# Altium PCB pcb.PcbDoc
Units mm, origin at the board's own origin, x right, y up, seen from the top; angles counter-clockwise.
Board outline 50 x 20 mm, 2 copper layers (Top Layer, Bottom Layer); 10 components, 7 nets, 20 pads, 0 vias.
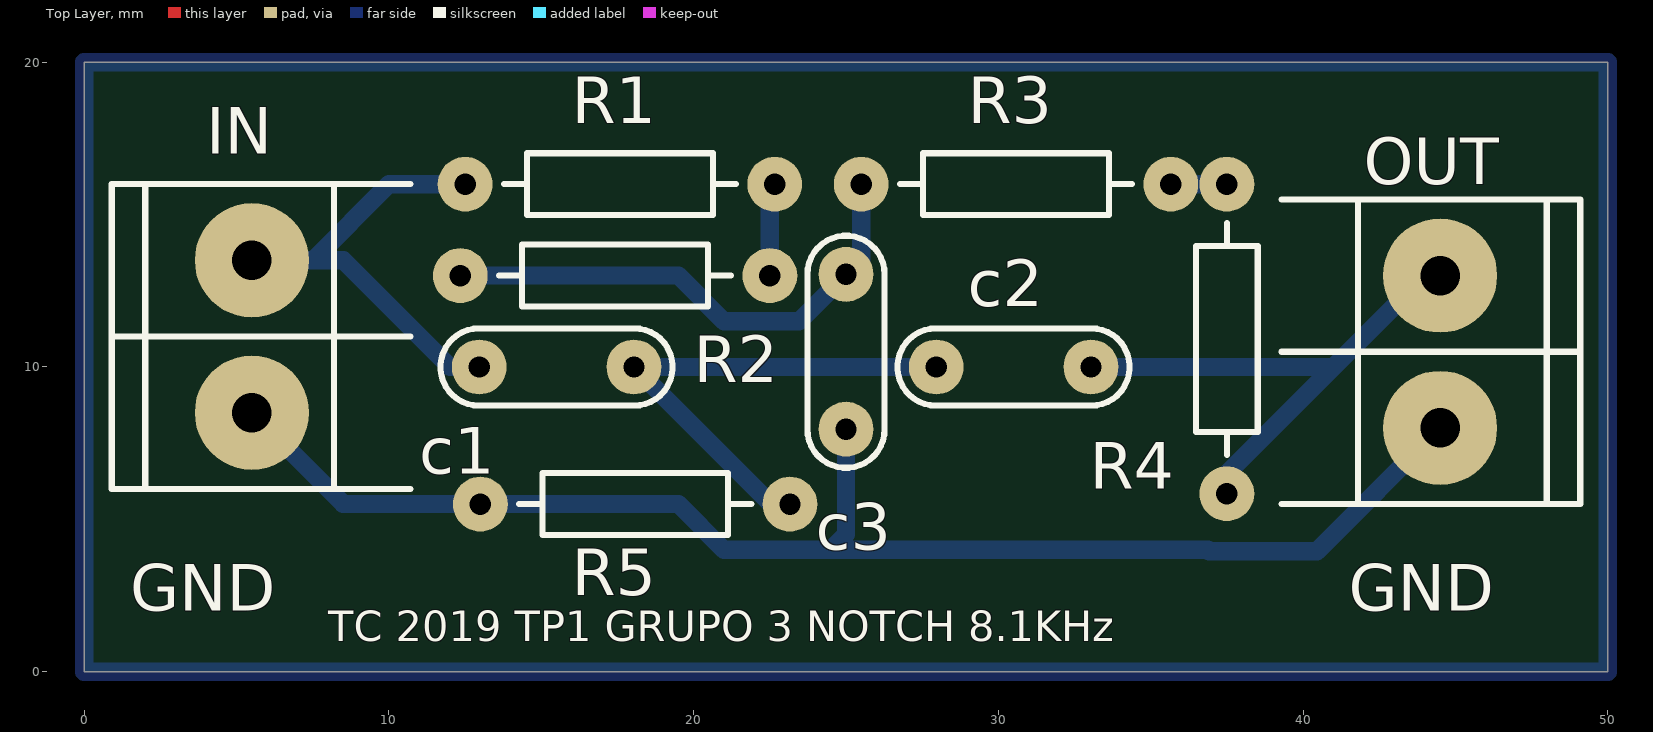
[diagram p0: Top Layer view]
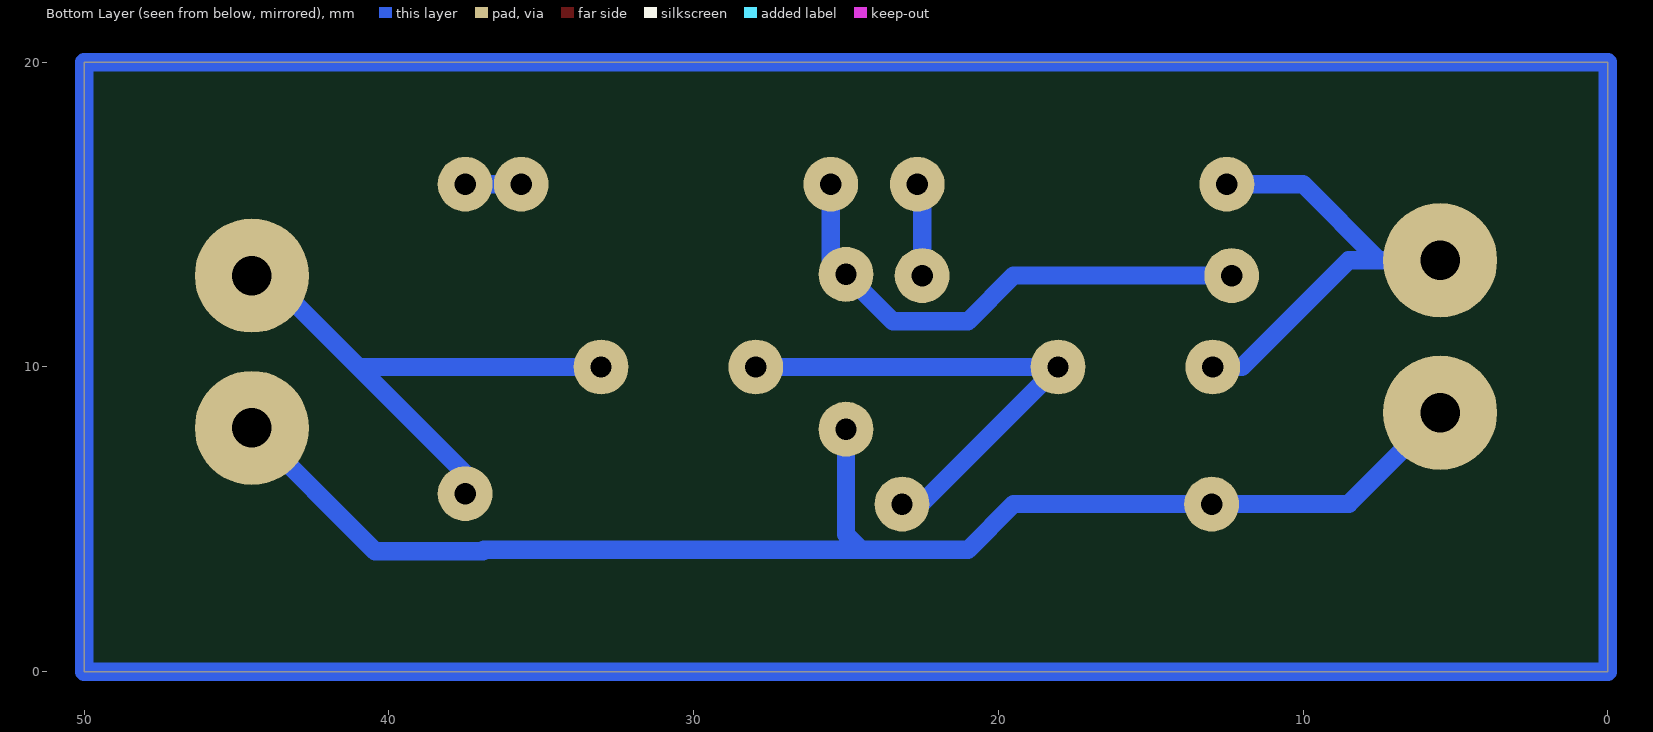
[diagram p1: Bottom Layer view, seen from below]
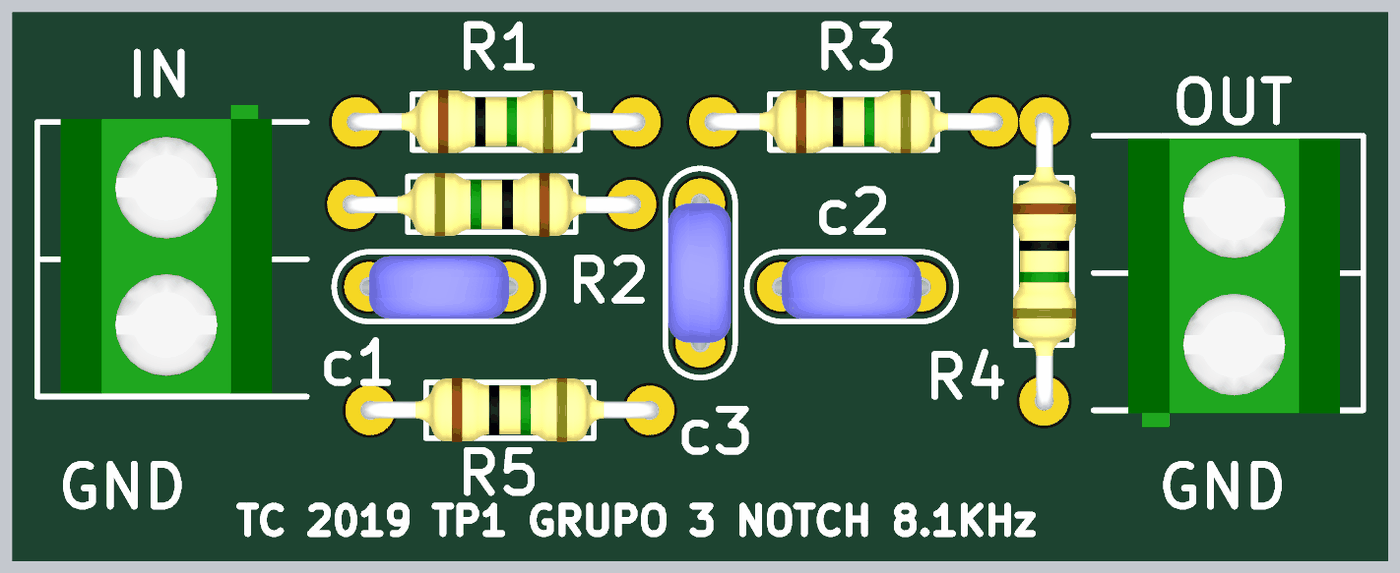
[diagram p2: 3D render of the assembled board from above, using the file's embedded part models]

## Layer stack, top to bottom
Top Solder: solder mask 0.0102, Solder Resist, Dk 3.5
Top Layer: signal copper 0.0356
Dielectric 1: dielectric 0.32, FR-4, Dk 4.8
Bottom Layer: signal copper 0.0356
Bottom Solder: solder mask 0.0102, Solder Resist, Dk 3.5

## Board outline
0,0 0,20 50,20 50,0

## Design rules (kind name [scope] priority, off if disabled: settings)
Clearance [All] p1: gap=0.3
PolygonConnect [All] p1: connectstyle=Relief reliefconductorwidth=0.254 reliefentries=4 polygonreliefangle="90 Angle" airgapwidth=0.254
RoutingVias [All] p1: holewidth=0.711 width=1.27 viastyle="Through Hole" minholewidth=0.711 minwidth=1.27 maxholewidth=0.711 maxwidth=1.27
SolderMaskExpansion [All] p1: expansion=0.102
Width [All] p1: maxlimit=0.6 minlimit=0.6 preferedwidth=0.6
30 further rules are at their usual default settings.

## Components (designator, comment, footprint, x,y, rotation, side; value= is the part's Value field where it differs from the comment)
c1 "2.5n" CAP200 15.5,10 r0 top
c2 "2.5n" CAP200 30.5,10 r0 top
c3 "5n" CAP200 25,10.5 r270 top
IN "BORNERA 2" BORNERA2 5.5,11 r0 top (schematic designator B1)
OUT "BORNERA 2" BORNERA2 44.5,10.5 r180 top (schematic designator B2)
R1 "6k8" RES400 12.5,16 r0 top
R2 "1k" RES400 22.5,13 r180 top
R3 "1k" RES400 25.5,16 r0 top
R4 "6K8" RES400 37.5,16 r270 top
R5 "3K3" RES400 13,5.5 r0 top

## Footprints (in the part's own frame and the unit in brackets; to place one, negate y for a bottom-side part, rotate by r counter-clockwise, add the part's x,y. Pads: shape width x height; smd on the part's side, far side on the other; paste and mask are expansions set on the pad)
BORNERA2 [mm] "Bornera con Tornillos 5mm separación"
  round 3.75 hole 1.3: 1(0,2.5) 2(0,-2.5)
  silkscreen extent -4.6,-5 5.2,5, body extent -3.76,-4.89 3.94,5.61, height 10
CAP200 [mm]
  round 1.8 hole 0.7: 1(-2.54,0) 2(2.54,0)
  silkscreen extent -3.81,-1.27 3.81,1.27, body extent -2.79,-1.17 2.79,1.12, height 6.24
RES400 [mm]
  round 1.8 hole 0.7: 1(0,0) 2(10.16,0)
  silkscreen extent 1.27,-1.02 8.89,1.02, body extent -0.3,-1.14 10.46,1.17, height 2.43

## Part data
c1 c2 c3: library part CAP
R1 R2 R3 R4 R5: library part RES

## Nets (pads, with @x,y where several pads share a name; then routed paths per layer and width w, separated by ;. In a path a pad name is that pad's centre, name@x,y a point inside that pad or via, vN(x,y) a via of type N, cw(c..) or ccw(c..) an arc to the next point about the centre after c; other vN are vias at no path point)
GND: c3.2 IN.2 OUT.1 R5.1 | length 46.7
  Bottom Layer w0.6: IN.2 8.5,5.5 R5.1 19.5,5.5 21,4 24.5,4 ; c3.2 25,4.5 24.5,4 ; OUT.1 40.453,3.953 36.925,3.953 36.878,4 24.5,4
NetB1_1: c1.1 IN.1 R1.1 | length 16.4
  Top Layer w0.6: IN.1 IN.1@7,13.5
  Bottom Layer w0.6: IN.1 7.5,13.5 ; R1.1 10,16 7.5,13.5 ; c1.1 12,10 8.5,13.5 7.5,13.5
NetB2_2: c2.2 OUT.2 R4.2 | length 18.3
  Bottom Layer w0.6: c2.2 41,10 ; R4.2@37.5,5.34 37.5,6.5 41,10 ; OUT.2@44,13 41,10
Netc1_2: c1.2 c2.1 R5.2 | length 16.9
  Bottom Layer w0.6: R5.2 22.54,5.5 c1.2 c2.1
Netc3_1: c3.1 R2.2 R3.1 | length 17.1
  Bottom Layer w0.6: R2.2 19.5,13 21,11.5 23.46,11.5 c3.1 25.5,13.54 R3.1
NetR1_2: R1.2 R2.1 | length 3.3
  Top Layer w0.6: R2.1 R2.1@22.66,13.16
  Bottom Layer w0.6: R2.1 22.5,15.84 R1.2
NetR3_2: R3.2 R4.1 | length 2
  Bottom Layer w0.6: R3.2 37,16 R4.1@37.5,15.5
copper on no net: | length 280
  Bottom Layer w0.6: 0,0 0,20 ; 0,0 50,0 ; 0,0 0,20 ; 0,0 50,0 ; 0,20 50,20 ; 0,20 49.5,20 50,20 ; 50,0 50,20 ; 50,0 50,20

## Silkscreen, mask and mechanical layers (free items; w line width, h text height)
Top Overlay:
  text "GND" at 1.5,2 h1.52
  text "GND" at 41.5,2 h1.52
  text "TC 2019 TP1 GRUPO 3 NOTCH 8.1KHz" at 8,1 h1